# Altium PCB LED kocka.PcbDoc
Units mil, origin at the board's own origin, x right, y up, seen from the top; angles counter-clockwise.
Board outline 5314.96 x 5314.96 mil, 2 copper layers (Top Layer, Bottom Layer); 247 components, 179 nets, 679 pads, 2 vias.
Unrouted connection lines stored in the file: 34.
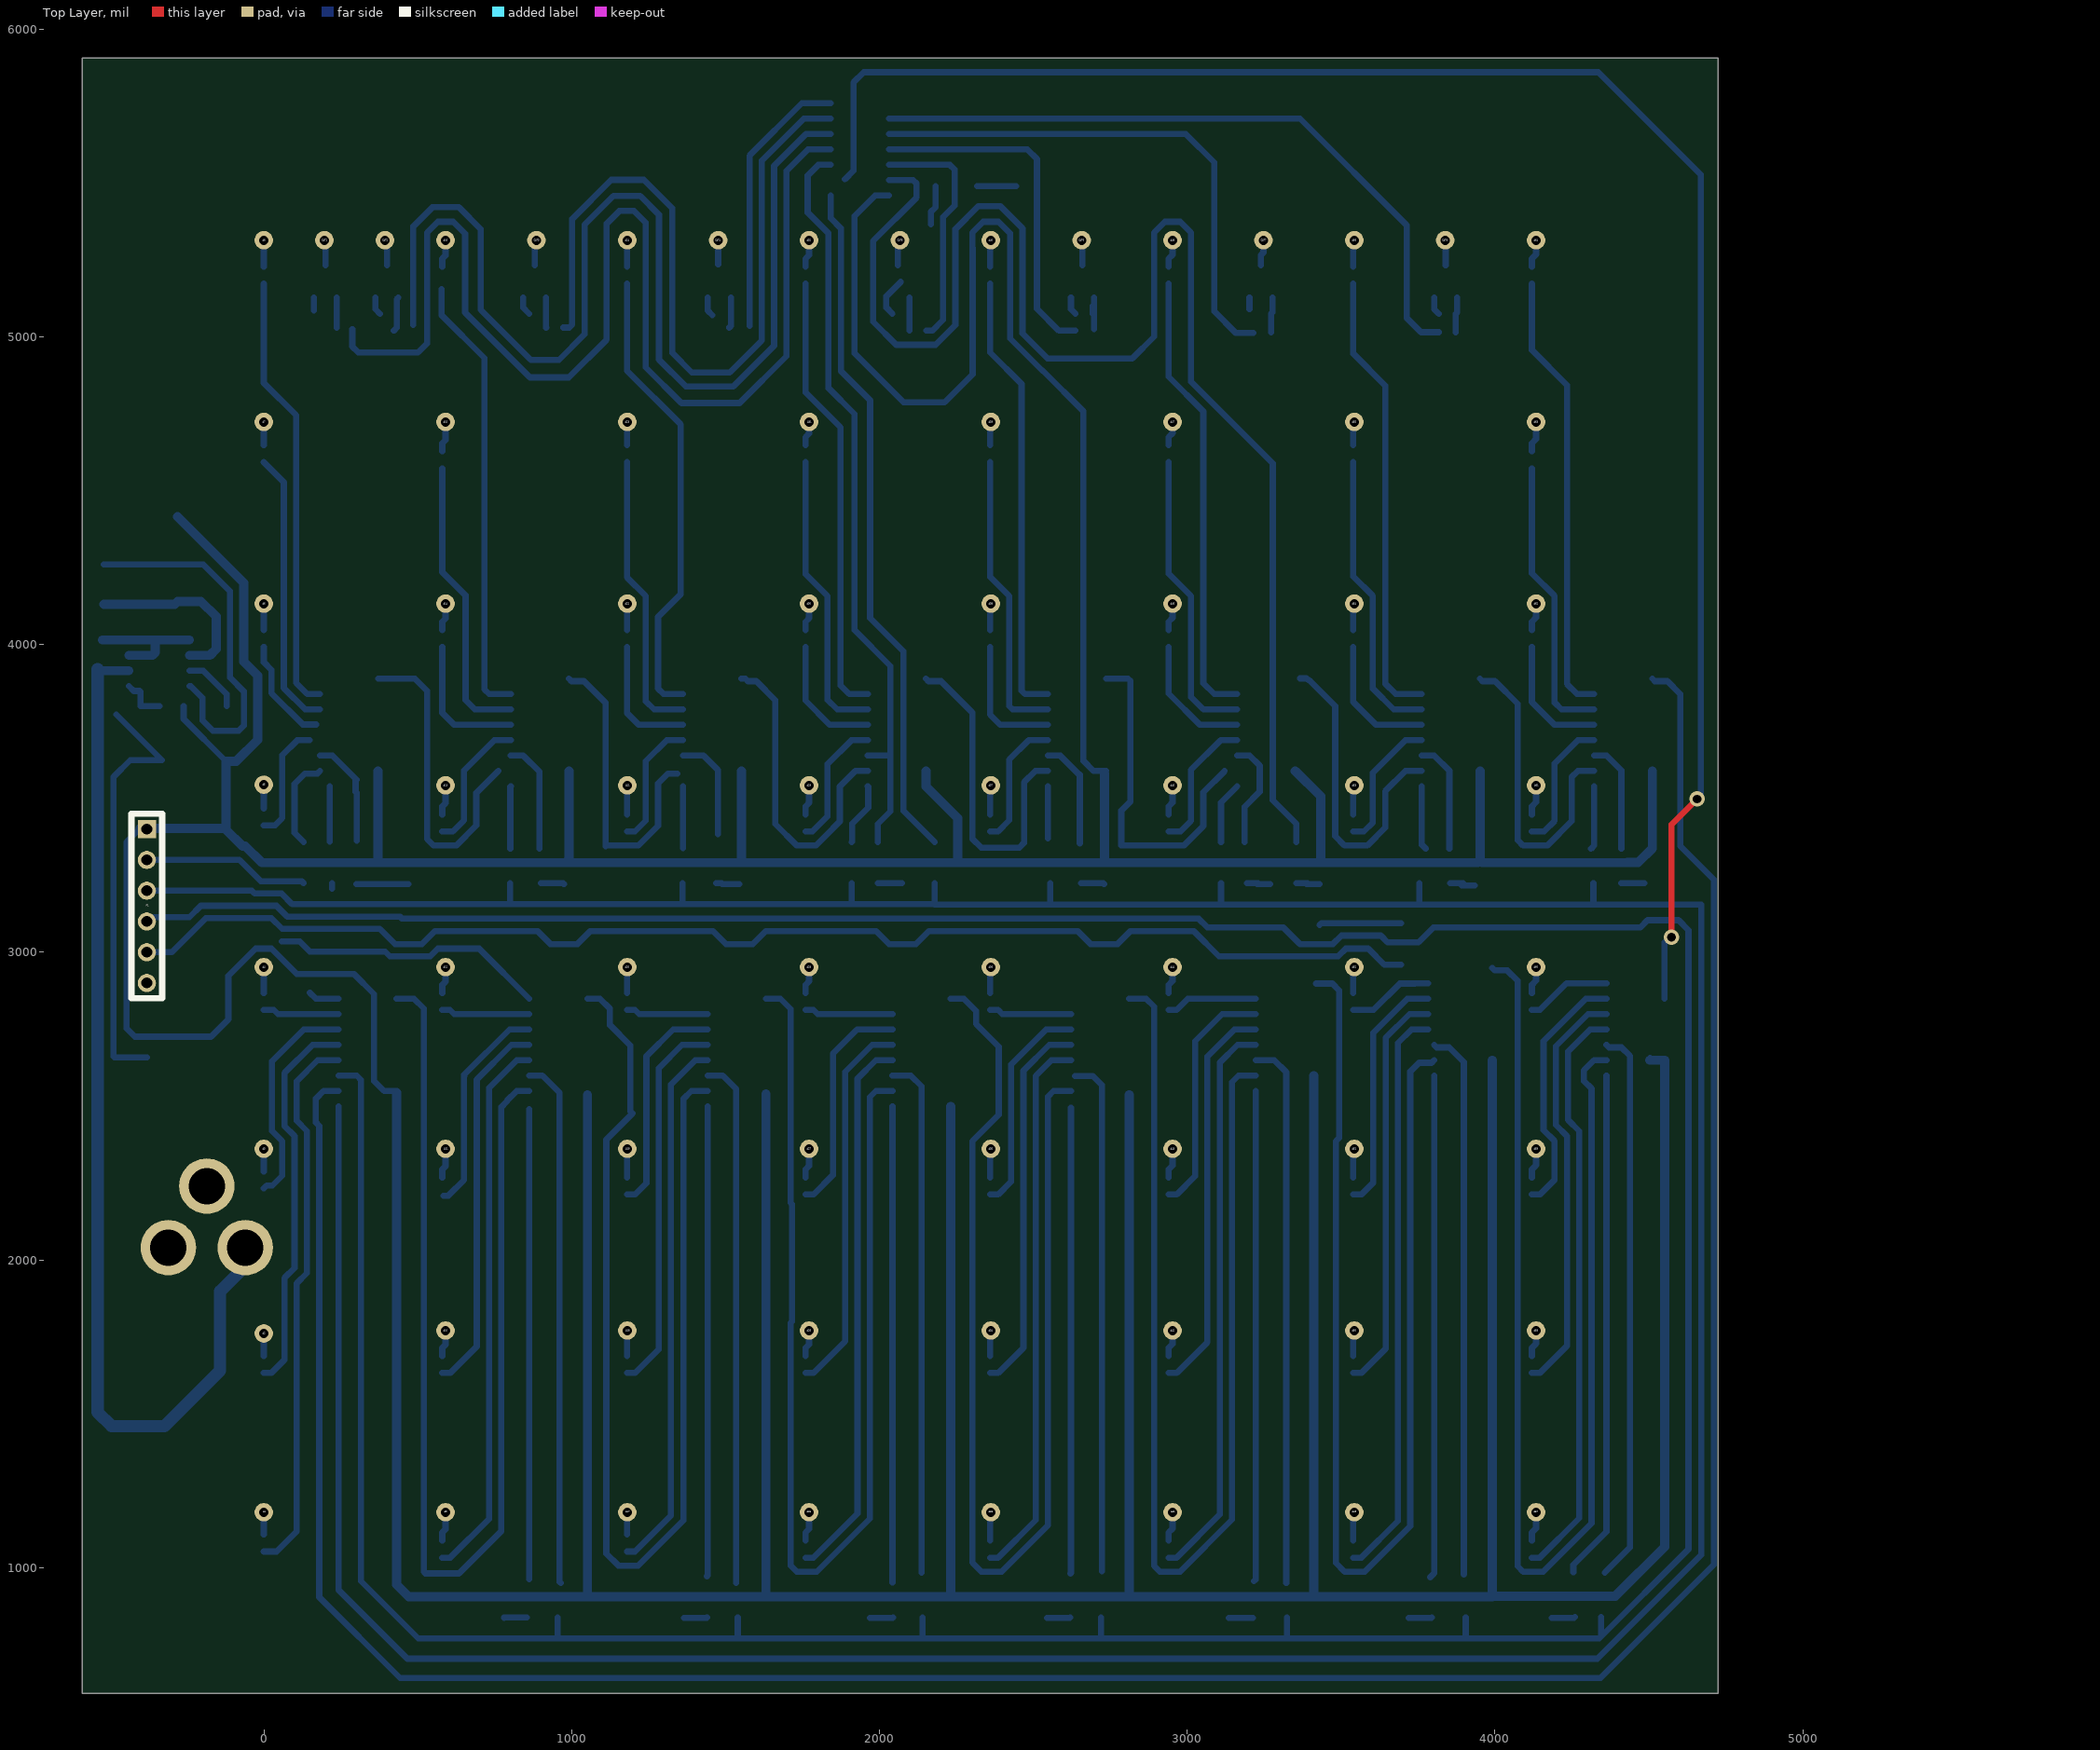
[diagram p0: Top Layer view]
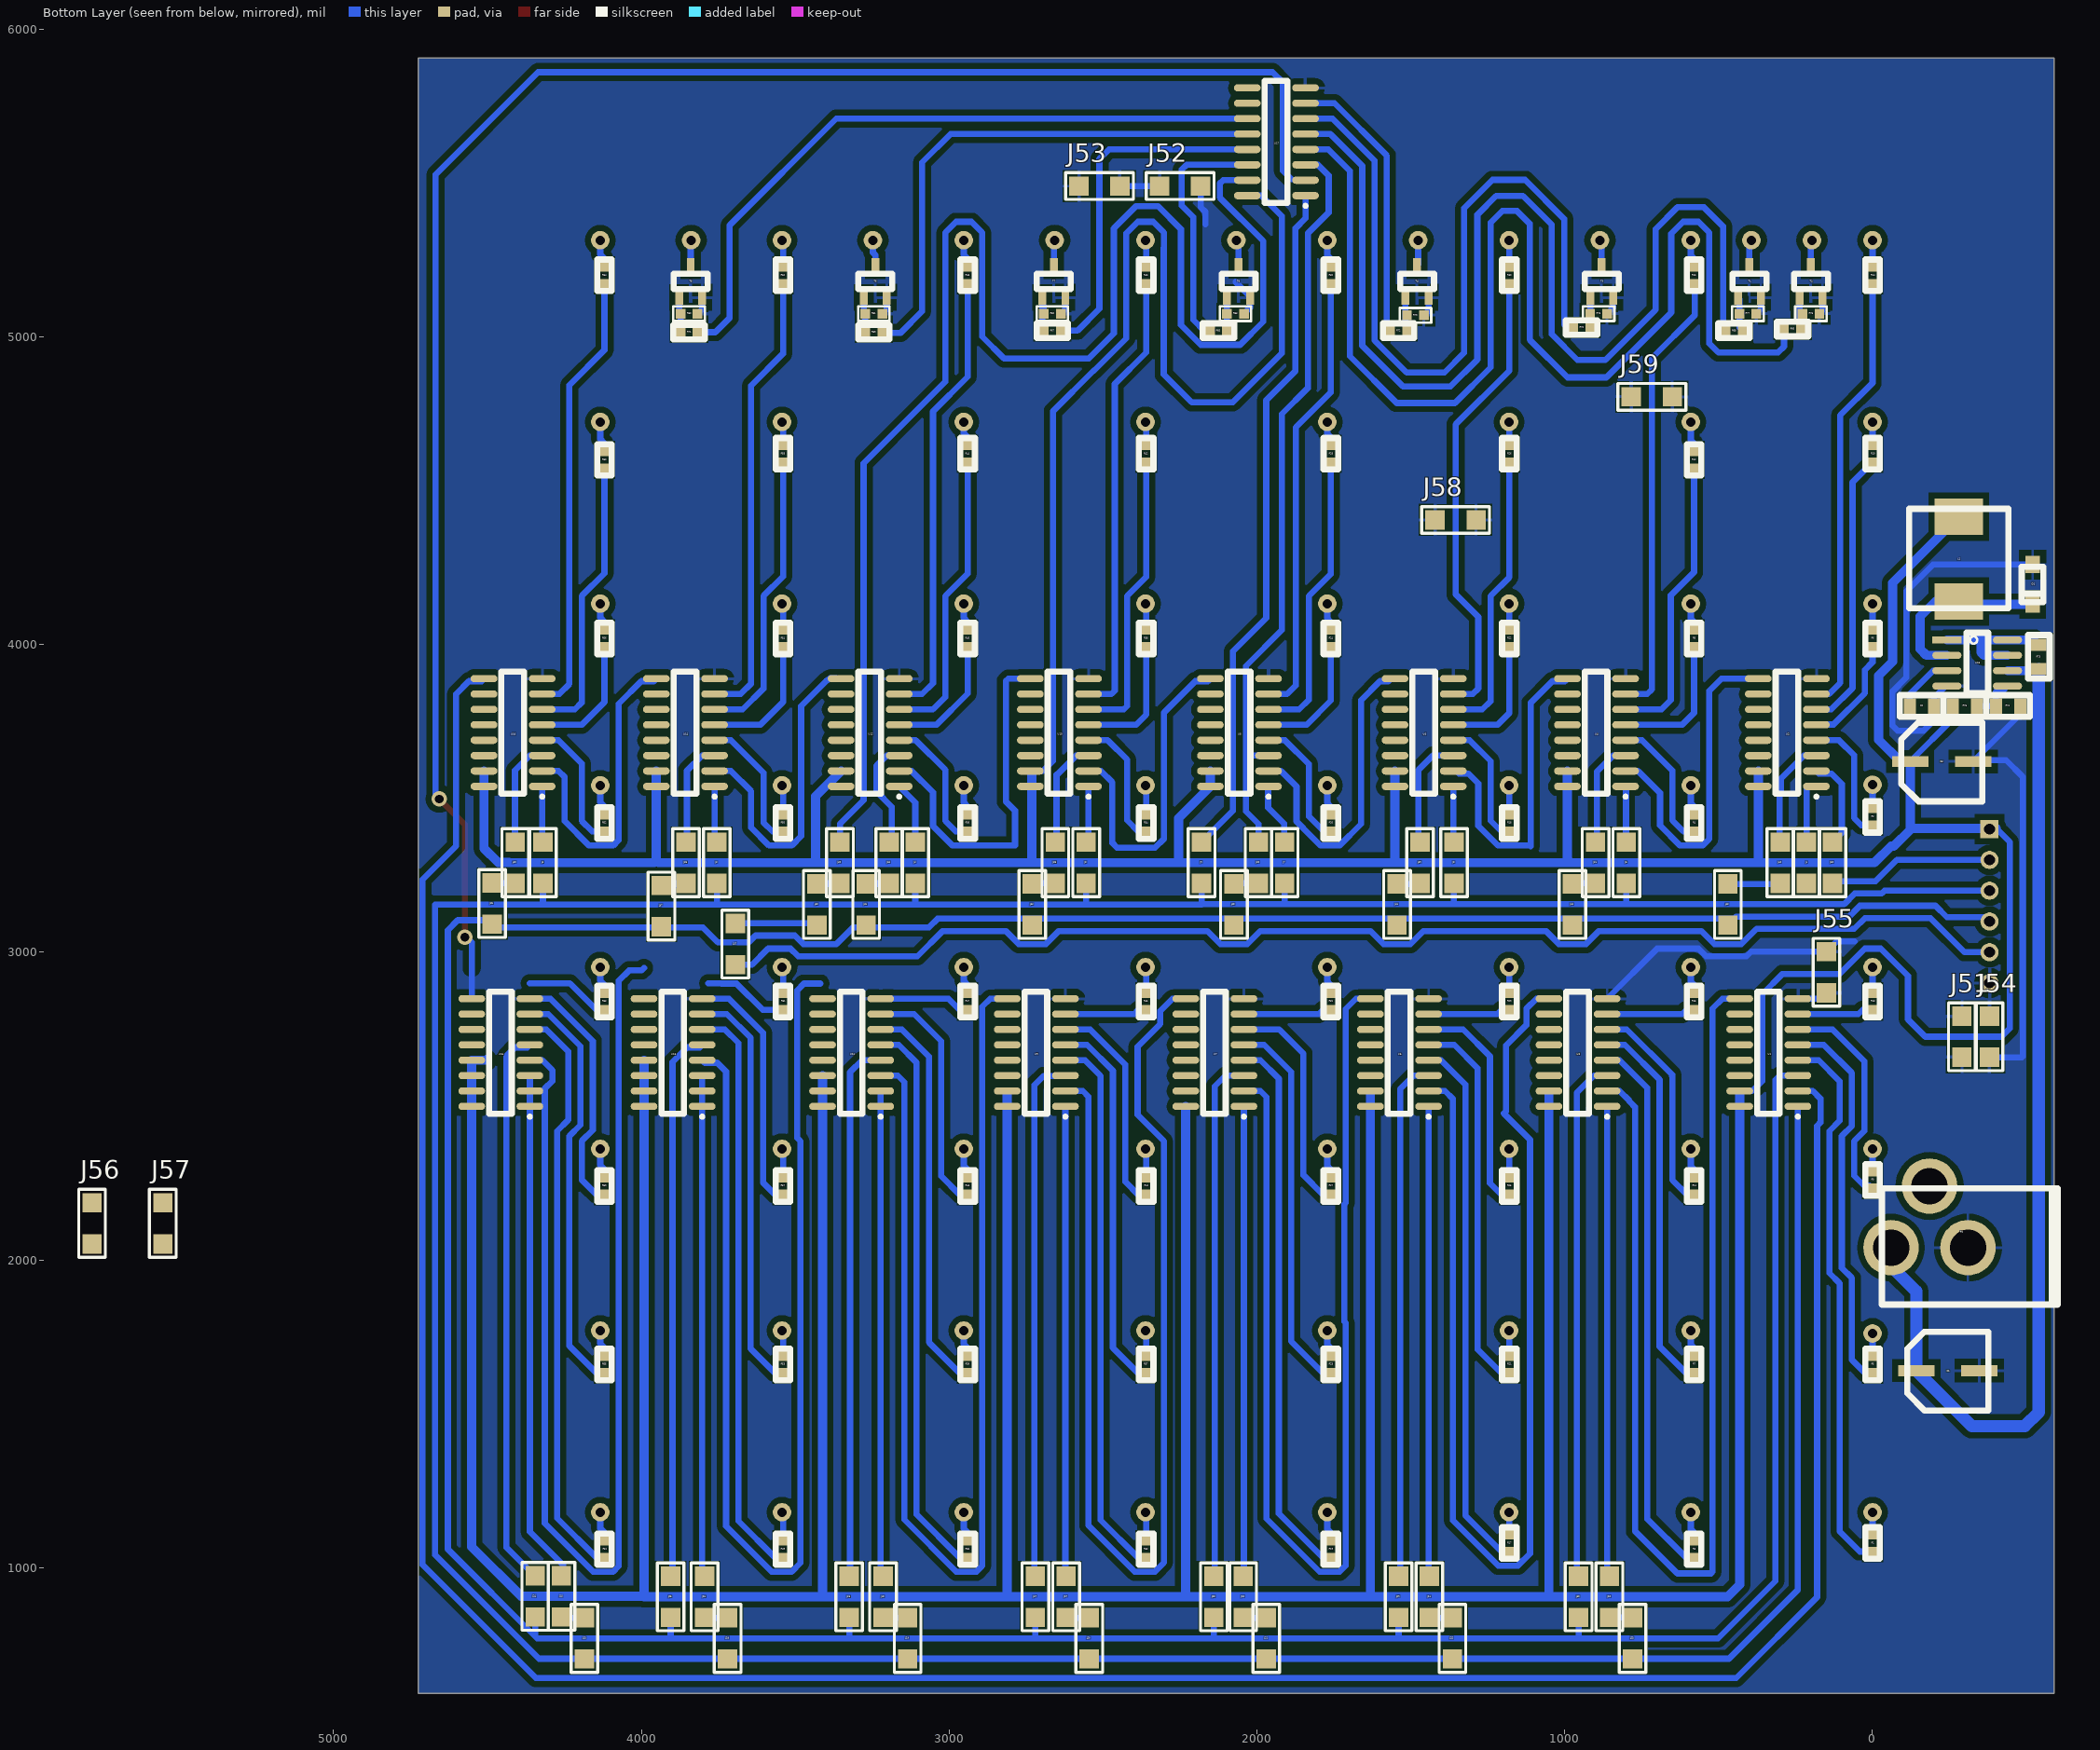
[diagram p1: Bottom Layer view, seen from below]
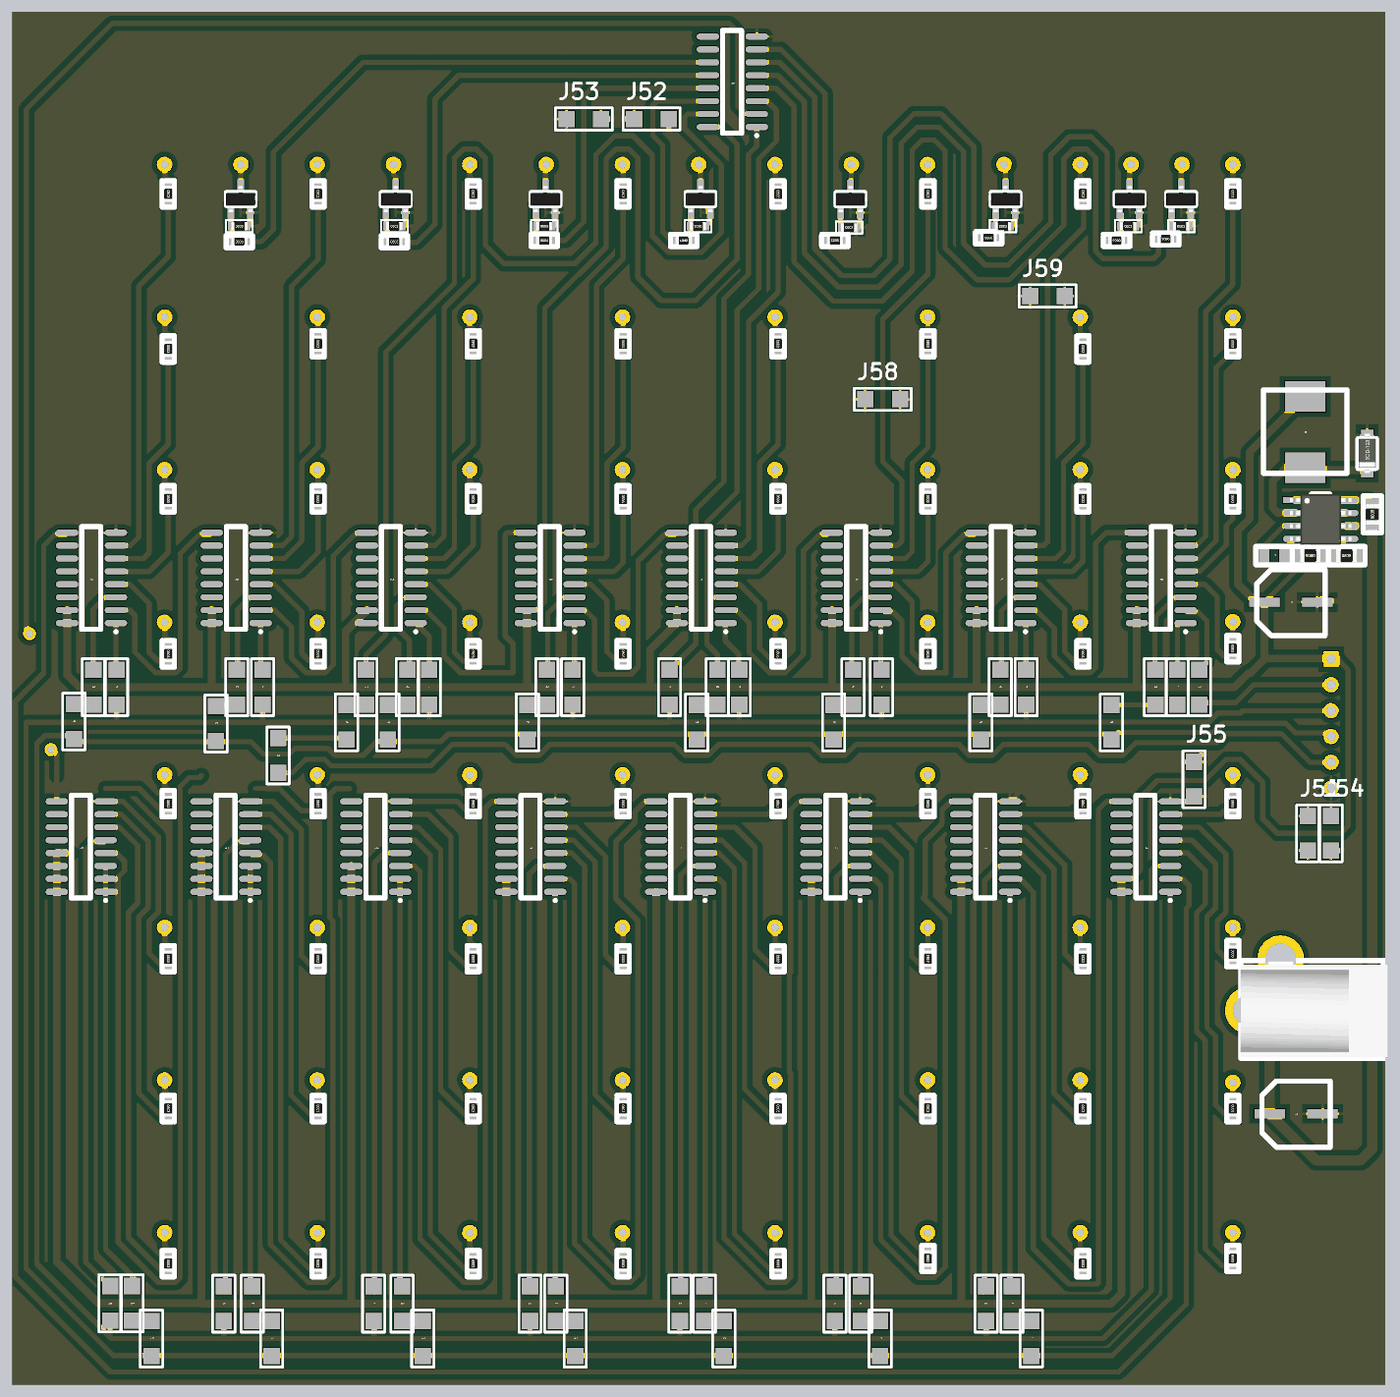
[diagram p2: 3D render of the assembled board from below, using the file's embedded part models]

## Layer stack, top to bottom
Top Layer: signal copper 1.4
Dielectric: dielectric 12.6, FR-4, Dk 4.8
Bottom Layer: signal copper 1.4

## Board outline
-590.55,590.55 4724.41,590.55 4724.41,5905.51 -590.55,5905.51

## Design rules (kind name [scope] priority, off if disabled: settings)
Clearance [All] p1: gap=20
PolygonConnect [All] p1: connectstyle=Relief reliefconductorwidth=10 reliefentries=4 polygonreliefangle="90 Angle"
RoutingVias [All] p1: holewidth=28 width=50 viastyle="Through Hole" minholewidth=28 minwidth=50 maxholewidth=28 maxwidth=50
SilkToSilkClearance [All] p1: silktosilkclearance=5
SilkscreenOverComponentPads [All] p1 off: minsilkscreentomaskgap=6
SolderMaskExpansion [All] p1: expansion=4
Width [All] p1: maxlimit=40 minlimit=20 preferedwidth=30
26 further rules are at their usual default settings.

## Components (designator, comment, footprint, x,y, rotation, side; value= is the part's Value field where it differs from the comment)
A1 "" via_300x400#1 0,1180 r0 top
A2 "" via_300x400#2 0,1770.55 r0 top
A3 "" via_300x400#1 0,2361.1 r0 top
A4 "" via_300x400#1 0,2951.65 r0 top
A5 "" via_300x400#3 0,3542.2 r0 top
A6 "" via_300x400#1 0,4132.76 r0 top
A7 "" via_300x400#1 0,4723.31 r0 top
A8 "" via_300x400#1 0,5313.86 r0 top
A9 "" via_300x400#1 590.55,1180 r90 top
A10 "" via_300x400#1 590.55,1770.55 r180 top
A11 "" via_300x400#1 590.55,2361.1 r90 top
A12 "" via_300x400#1 590.55,2951.65 r180 top
A13 "" via_300x400#1 590.55,3542.2 r180 top
A14 "" via_300x400#1 590.55,4132.76 r180 top
A15 "" via_300x400#1 590.55,4723.31 r180 top
A16 "" via_300x400#1 590.55,5313.86 r180 top
A17 "" via_300x400#1 1181.1,1180 r180 top
A18 "" via_300x400#1 1181.1,1770.55 r180 top
A19 "" via_300x400#1 1181.1,2361.1 r180 top
A20 "" via_300x400#1 1181.1,2951.65 r180 top
A21 "" via_300x400#1 1181.1,3542.2 r90 top
A22 "" via_300x400#1 1181.1,4132.76 r180 top
A23 "" via_300x400#1 1181.1,4723.31 r180 top
A24 "" via_300x400#1 1181.1,5313.86 r180 top
A25 "" via_300x400#1 1771.65,1180 r180 top
A26 "" via_300x400#1 1771.65,1770.55 r180 top
A27 "" via_300x400#1 1771.65,2361.1 r180 top
A28 "" via_300x400#1 1771.65,2951.65 r180 top
A29 "" via_300x400#1 1771.65,3542.2 r180 top
A30 "" via_300x400#1 1771.65,4132.76 r180 top
A31 "" via_300x400#1 1771.65,4723.31 r90 top
A32 "" via_300x400#1 1771.65,5313.86 r180 top
A33 "" via_300x400#1 2362.2,1180 r180 top
A34 "" via_300x400#1 2362.2,1770.55 r180 top
A35 "" via_300x400#1 2362.2,2361.1 r180 top
A36 "" via_300x400#1 2362.2,2951.65 r180 top
A37 "" via_300x400#1 2362.2,3542.2 r180 top
A38 "" via_300x400#1 2362.2,4132.76 r180 top
A39 "" via_300x400#1 2362.2,4723.31 r180 top
A40 "" via_300x400#1 2362.2,5313.86 r180 top
A41 "" via_300x400#1 2952.76,1180 r90 top
A42 "" via_300x400#1 2952.76,1770.55 r180 top
A43 "" via_300x400#1 2952.76,2361.1 r180 top
A44 "" via_300x400#1 2952.76,2951.65 r180 top
A45 "" via_300x400#1 2952.76,3542.2 r180 top
A46 "" via_300x400#1 2952.76,4132.76 r180 top
A47 "" via_300x400#1 2952.76,4723.31 r180 top
A48 "" via_300x400#1 2952.76,5313.86 r180 top
A49 "" via_300x400#1 3543.31,1180 r180 top
A50 "" via_300x400#1 3543.31,1770.55 r180 top
A51 "" via_300x400#1 3543.31,2361.1 r90 top
A52 "" via_300x400#1 3543.31,2951.65 r180 top
A53 "" via_300x400#1 3543.31,3542.2 r180 top
A54 "" via_300x400#1 3543.31,4132.76 r180 top
A55 "" via_300x400#1 3543.31,4723.31 r180 top
A56 "" via_300x400#1 3543.31,5313.86 r180 top
A57 "" via_300x400#1 4133.86,1180 r180 top
A58 "" via_300x400#1 4133.86,1770.55 r180 top
A59 "" via_300x400#1 4133.86,2361.1 r180 top
A60 "" via_300x400#1 4133.86,2951.65 r180 top
A61 "" via_300x400#1 4133.86,3542.2 r90 top
A62 "" via_300x400#1 4133.86,4132.76 r180 top
A63 "" via_300x400#1 4133.86,4723.31 r180 top
A64 "" via_300x400#1 4133.86,5313.86 r180 top
C1 "100uF" FP_CAP_ELKO_6,3X6,3 -160,1640 r180 bottom
C2 "470pF" FP_0805_CAP_085 -160,3800 r0 bottom
C3 "100uF" FP_CAP_ELKO_6,3X6,3 -140,3620 r180 bottom
CAT1 "" via_300x400#4 180,5313.86 r180 top
CAT2 "" via_300x400#5 380,5313.86 r180 top
CAT3 "" via_300x400#6 880,5313.86 r180 top
CAT4 "" via_300x400#7 1440,5313.86 r180 top
CAT5 "" via_300x400#8 2060,5313.86 r180 top
CAT6 "" via_300x400#9 2640,5313.86 r180 top
CAT7 "" via_300x400#10 3220,5313.86 r180 top
CAT8 "" via_300x400#11 3820,5313.86 r180 top
D1 "1N5819" FP_SOD-123 -520,4260 r270 bottom
J1 "0R" FP_1206_RES_SIMPLE 215,3291 r270 bottom
J2 "0R" FP_1206_RES_SIMPLE 3755,3291 r270 bottom
J3 "0R" FP_1206_RES_SIMPLE 4320,3291 r270 bottom
J4 "0R" FP_1206_RES_SIMPLE 3110,3291 r270 bottom
J5 "0R" FP_1206_RES_SIMPLE 800,3291 r270 bottom
J6 "0R" FP_1206_RES_SIMPLE 1360,3291 r270 bottom
J7 "0R" FP_1206_RES_SIMPLE 1910,3291 r270 bottom
J8 "0R" FP_1206_RES_SIMPLE 2555,3291 r270 bottom
J9 "0R" FP_1206_RES_SIMPLE 2180,3291 r270 bottom
J10 "0R" FP_1206_RES_SIMPLE 855,905 r270 bottom
J11 "0R" FP_1206_RES_SIMPLE 1440,905 r270 bottom
J12 "0R" FP_1206_RES_SIMPLE 2045,905 r270 bottom
J13 "0R" FP_1206_RES_SIMPLE 4185,770 r270 bottom
J14 "0R" FP_1206_RES_SIMPLE 4260,906.49 r270 bottom
J15 "0R" FP_1206_RES_SIMPLE 3795,905 r270 bottom
J16 "0R" FP_1206_RES_SIMPLE 3215,905 r270 bottom
J17 "0R" FP_1206_RES_SIMPLE 2620,905 r270 bottom
J18 "0R" FP_1206_RES_SIMPLE 3720,770 r90 bottom
J19 "0R" FP_1206_RES_SIMPLE 3135,770 r90 bottom
J20 "0R" FP_1206_RES_SIMPLE 2545,770 r90 bottom
J21 "0R" FP_1206_RES_SIMPLE 1970,770 r90 bottom
J22 "0R" FP_1206_RES_SIMPLE 1365,770 r90 bottom
J23 "0R" FP_1206_RES_SIMPLE 780,770 r90 bottom
J24 "0R" FP_1206_RES_SIMPLE 4345,906.49 r90 bottom
J25 "0R" FP_1206_RES_SIMPLE 3905,905 r90 bottom
J26 "0R" FP_1206_RES_SIMPLE 3325,905 r90 bottom
J27 "0R" FP_1206_RES_SIMPLE 2720,905 r90 bottom
J28 "0R" FP_1206_RES_SIMPLE 2140,905 r90 bottom
J29 "0R" FP_1206_RES_SIMPLE 1540,905 r90 bottom
J30 "0R" FP_1206_RES_SIMPLE 955,905 r90 bottom
J31 "0R" FP_1206_RES_SIMPLE 900,3291 r90 bottom
J32 "0R" FP_1206_RES_SIMPLE 1995,3291 r90 bottom
J33 "0R" FP_1206_RES_SIMPLE 2730,3155 r90 bottom
J34 "0R" FP_1206_RES_SIMPLE 3195,3291 r90 bottom
J35 "0R" FP_1206_RES_SIMPLE 4485,3158 r270 bottom
J36 "0R" FP_1206_RES_SIMPLE 3855,3291 r90 bottom
J37 "0R" FP_1206_RES_SIMPLE 3935,3150 r90 bottom
J38 "0R" FP_1206_RES_SIMPLE 2655,3291 r90 bottom
J39 "0R" FP_1206_RES_SIMPLE 1470,3291 r90 bottom
J40 "0R" FP_1206_RES_SIMPLE 4410,3291 r90 bottom
J41 "0R" FP_1206_RES_SIMPLE 1545,3155 r90 bottom
J42 "0R" FP_1206_RES_SIMPLE 300,3291 r90 bottom
J43 "0R" FP_1206_RES_SIMPLE 470,3155 r90 bottom
J44 "0R" FP_1206_RES_SIMPLE 975,3155 r90 bottom
J45 "0R" FP_1206_RES_SIMPLE 3270,3155 r90 bottom
J46 "0R" FP_1206_RES_SIMPLE 2075,3155 r90 bottom
J47 "0R" FP_1206_RES_SIMPLE 3695,3026.57 r90 bottom
J48 "0R" FP_1206_RES_SIMPLE 3430,3155 r90 bottom
J49 "0R" FP_1206_RES_SIMPLE 3355,3291 r90 bottom
J50 "0R" FP_1206_RES_SIMPLE 130,3291 r90 bottom
J51 "0R" FP_1206_RES_SIMPLE -290,2725.43 r90 bottom
J52 "0R" FP_1206_RES_SIMPLE 2250,5490 r180 bottom
J53 "0R" FP_1206_RES_SIMPLE 2512,5490 r180 bottom
J54 "0R" FP_1206_RES_SIMPLE -380,2725.43 r90 bottom
J55 "0R" FP_1206_RES_SIMPLE 150,2935 r90 bottom
J56 "0R" FP_1206_RES_SIMPLE 5785,2119 r90 bottom
J57 "0R" FP_1206_RES_SIMPLE 5555,2119 r90 bottom
J58 "0R" FP_1206_RES_SIMPLE 1355,4405 r180 bottom
J59 "0R" FP_1206_RES_SIMPLE 717,4805 r180 bottom
L1 "220uH" FP_IND_MURATA3131 -280,4140 r180 bottom
P1 "Header 6" HDR1X6 -380,3400 r270 top
P2 "Header 2" FP_DC_TAP_ANYA -60,2040 r270 bottom
R1 "1K" FP_0603_RES 0,1080 r270 bottom
R2 "1K" FP_0603_RES 0,3440 r270 bottom
R3 "1K" FP_0603_RES 580,1060 r270 bottom
R4 "1K" FP_0603_RES 580,3420 r270 bottom
R5 "1K" FP_0603_RES 0,1660 r270 bottom
R6 "1K" FP_0603_RES 0,4020 r270 bottom
R7 "1K" FP_0603_RES 580,1660 r270 bottom
R8 "1K" FP_0603_RES 580,4020 r270 bottom
R9 "1K" FP_0603_RES 0,2260 r270 bottom
R10 "1K" FP_0603_RES 0,4620 r270 bottom
R11 "1K" FP_0603_RES 580,2240 r270 bottom
R12 "1K" FP_0603_RES 580,4600 r270 bottom
R13 "1K" FP_0603_RES 0,2840 r270 bottom
R14 "1K" FP_0603_RES 0,5200 r270 bottom
R15 "1K" FP_0603_RES 580,2840 r270 bottom
R16 "1K" FP_0603_RES 580,5200 r270 bottom
R17 "1K" FP_0603_RES 1180,1080 r270 bottom
R18 "1K" FP_0603_RES 1180,3420 r270 bottom
R19 "1K" FP_0603_RES 1760,1060 r270 bottom
R20 "1K" FP_0603_RES 1760,3420 r270 bottom
R21 "1K" FP_0603_RES 1180,1660 r270 bottom
R22 "1K" FP_0603_RES 1180,4020 r270 bottom
R23 "1K" FP_0603_RES 1760,1660 r270 bottom
R24 "1K" FP_0603_RES 1760,4020 r270 bottom
R25 "1K" FP_0603_RES 1180,2240 r270 bottom
R26 "1K" FP_0603_RES 1180,4620 r270 bottom
R27 "1K" FP_0603_RES 1760,2240 r270 bottom
R28 "1K" FP_0603_RES 1760,4620 r270 bottom
R29 "1K" FP_0603_RES 1180,2840 r270 bottom
R30 "1K" FP_0603_RES 1180,5200 r270 bottom
R31 "1K" FP_0603_RES 1760,2840 r270 bottom
R32 "1K" FP_0603_RES 1760,5200 r270 bottom
R33 "1K" FP_0603_RES 2360,1060 r270 bottom
R34 "1K" FP_0603_RES 2360,3420 r270 bottom
R35 "1K" FP_0603_RES 2940,1060 r270 bottom
R36 "1K" FP_0603_RES 2940,3420 r270 bottom
R37 "1K" FP_0603_RES 2360,1660 r270 bottom
R38 "1K" FP_0603_RES 2360,4020 r270 bottom
R39 "1K" FP_0603_RES 2940,1660 r270 bottom
R40 "1K" FP_0603_RES 2940,4020 r270 bottom
R41 "1K" FP_0603_RES 2360,2240 r270 bottom
R42 "1K" FP_0603_RES 2360,4620 r270 bottom
R43 "1K" FP_0603_RES 2940,2240 r270 bottom
R44 "1K" FP_0603_RES 2940,4620 r270 bottom
R45 "1K" FP_0603_RES 2360,2840 r270 bottom
R46 "1K" FP_0603_RES 2360,5200 r270 bottom
R47 "1K" FP_0603_RES 2940,2840 r270 bottom
R48 "1K" FP_0603_RES 2940,5200 r270 bottom
R49 "1K" FP_0603_RES 3540,1060 r270 bottom
R50 "1K" FP_0603_RES 3540,3420 r270 bottom
R51 "1K" FP_0603_RES 4120,1060 r270 bottom
R52 "1K" FP_0603_RES 4120,3420 r270 bottom
R53 "1K" FP_0603_RES 3540,1660 r270 bottom
R54 "1K" FP_0603_RES 3540,4020 r270 bottom
R55 "1K" FP_0603_RES 4120,1660 r270 bottom
R56 "1K" FP_0603_RES 4120,4020 r270 bottom
R57 "1K" FP_0603_RES 3540,2240 r270 bottom
R58 "1K" FP_0603_RES 3540,4620 r270 bottom
R59 "1K" FP_0603_RES 4120,2240 r270 bottom
R60 "1K" FP_0603_RES 4120,4600 r270 bottom
R61 "1K" FP_0603_RES 3540,2840 r270 bottom
R62 "1K" FP_0603_RES 3540,5200 r270 bottom
R63 "1K" FP_0603_RES 4120,2840 r270 bottom
R64 "1K" FP_0603_RES 4120,5200 r270 bottom
R65 "1K" FP_0603_RES 2125,5020 r0 bottom
R66 "1K" FP_0603_RES 260,5025 r0 bottom
R67 "1K" FP_0603_RES 2665,5020 r180 bottom
R68 "1K" FP_0603_RES 450,5020 r0 bottom
R69 "1K" FP_0603_RES 3245,5015 r180 bottom
R70 "1K" FP_0603_RES 945,5030 r0 bottom
R71 "1K" FP_0603_RES 3845,5015 r180 bottom
R72 "1K" FP_0603_RES 1540,5020 r0 bottom
R73 "0.33R" FP_0805_RES -540,3960 r90 bottom
R74 "1K" FP_0805_RES -440,3800 r180 bottom
R75 "3K" FP_0805_RES -300,3800 r0 bottom
R76 "47K" FP_0603_RES 200,5075 r180 bottom
R77 "47K" FP_0603_RES 405,5075 r180 bottom
R78 "47K" FP_0603_RES 890,5075 r180 bottom
R79 "47K" FP_0603_RES 1485,5070 r180 bottom
R80 "47K" FP_0603_RES 3845,5075 r180 bottom
R81 "47K" FP_0603_RES 3245,5075 r180 bottom
R82 "47K" FP_0603_RES 2665,5075 r180 bottom
R83 "47K" FP_0603_RES 2070,5075 r0 bottom
T1 "NMOS" BBMF170 400,5180 r270 bottom
T2 "NMOS" BBMF170 200,5180 r270 bottom
T3 "NMOS" BBMF170 880,5180 r270 bottom
T4 "NMOS" BBMF170 1480,5180 r270 bottom
T5 "NMOS" BBMF170 3840,5180 r270 bottom
T6 "NMOS" BBMF170 3240,5180 r270 bottom
T7 "NMOS" BBMF170 2660,5180 r270 bottom
T8 "NMOS" BBMF170 2060,5180 r270 bottom
U1 "74HC4094" SOIC16 340,2700 r270 bottom
U2 "74HC4094" SOIC16 280,3740 r270 bottom
U3 "74HC4094" SOIC16 960,2700 r270 bottom
U4 "74HC4094" SOIC16 900,3740 r270 bottom
U5 "74HC4094" SOIC16 1540,2700 r270 bottom
U6 "74HC4094" SOIC16 1460,3740 r270 bottom
U7 "74HC4094" SOIC16 2140,2700 r270 bottom
U8 "74HC4094" SOIC16 2060,3740 r270 bottom
U9 "74HC4094" SOIC16 2720,2700 r270 bottom
U10 "74HC4094" SOIC16 2645,3740 r270 bottom
U11 "74HC4094" SOIC16 3320,2700 r270 bottom
U12 "74HC4094" SOIC16 3260,3740 r270 bottom
U13 "74HC4094" SOIC16 3900,2700 r270 bottom
U14 "74HC4094" SOIC16 3860,3740 r270 bottom
U15 "74HC4094" SOIC16 4460,2700 r270 bottom
U16 "74HC4094" SOIC16 4420,3740 r270 bottom
U17 "74HC4094" SOIC16 1940,5660 r270 bottom
U18 "MC34063A" FP_SO8_MS012AA -340,3940 r180 bottom

## Footprints (in the part's own frame and the unit in brackets; to place one, negate y for a bottom-side part, rotate by r counter-clockwise, add the part's x,y. Pads: shape width x height; smd on the part's side, far side on the other; paste and mask are expansions set on the pad)
BBMF170 [mm] "SOT23-3 tok"
  rect 1.2x0.65 smd: D(-1.327,0) G(1.327,-0.95) S(1.327,0.95)
  silkscreen extent -0.64,-1.4 0.64,1.4, body extent -1.27,-1.46 1.27,1.46, height 0.97
FP_0603_RES [mm] "0603 ellenállás"
  rect 0.8x0.8 smd: 1(-0.7,0) 2(0.7,0)
  silkscreen extent -1.3,-0.6 1.3,0.6, body extent -0.8,-0.4 0.8,0.4, height 0.44
FP_0805_CAP_085 [mm] "0805 kapacitás YAGEO 0.85mm magas"
  rect 1x1.3 smd: 1(-1,0) 2(1,0)
  silkscreen extent -1.8,-0.9 1.8,0.9, body extent -1,-0.64 1.03,0.64, height 0.85
FP_0805_RES [mm] "0805 ellenállás"
  rect 1x1.3 smd: 1(-1,0) 2(1,0)
  silkscreen extent -1.8,-0.9 1.8,0.9, body extent -1,-0.62 1,0.63, height 0.62
FP_1206_RES_SIMPLE [mm] "1206 ellenállás, amit én csináltam"
  rect 1.6x1.6 smd: 1(-1.7,0) 2(1.7,0)
  silkscreen extent -2.8,-1.1 2.8,1.1, body extent -1.52,-0.79 1.58,0.79, height 0.5
FP_CAP_ELKO_6,3X6,3 [mm] "680 uF/SMD-NIC 47 uF/SMD-NIC ELKO 16 V 105°C 20 % KIS IMPEDANCIÁS SMD O6,3x6,3mm"
  rect 3x0.9 smd: N(4.75,0) P(-0.45,0)
  silkscreen extent -1.2,-3.3 5.5,3.2, body extent -1.25,-3.3 5.35,3.3, height 6.3
FP_DC_TAP_ANYA [mil] "DC HEBA25 TÁPFESZÜLTSÉG ALJZAT ZÁRT, NYÁKBA 90°"
  round 180 hole 118: 1(0,0) 2(0,250) 3(-200,125)
  silkscreen extent -193,-30 185,541, body extent -190,-31 183,539, height 440
FP_IND_MURATA3131 [mm] "Murata Chip Inductor LQH88P Series (3131 Size)"
  rect 4x3 smd: 1(0,0) 2(0,7)
  silkscreen extent -4.1,-0.55 4.1,7.65, body extent -4,-0.55 4,7.65, height 3.8
FP_SO8_MS012AA [mm] "SO8 JEDEC MS-012AA, Analog Devices R-8, SO8-SOT96-1, NS M08A"
  rect 2.4x0.6 smd: 1(-2.5,1.905)
  oval 2.4x0.6 smd: 2(-2.5,0.635) 3(-2.5,-0.635) 4(-2.5,-1.905) 5(2.5,-1.905) 6(2.5,-0.635) 7(2.5,0.635) 8(2.5,1.905)
  silkscreen extent -0.9,-2.5 0.9,2.5, body extent -3.03,-2.5 3.03,2.5, height 1.9
FP_SOD-123 [mm]
  rect 1.41x1.22 smd: 1(3.27,0) 2(0,0)
  silkscreen extent 0.2,-0.9 3.1,0.9, body extent -0.3,-0.85 3.55,0.85, height 1.47
HDR1X6 [mm] "Connector; Header; 6 Position"
  rect 1.5x1.5 hole 0.9: 1(0,0)
  round 1.5 hole 0.9: 2(2.54,0) 3(5.08,0) 4(7.62,0) 5(10.16,0) 6(12.7,0)
  silkscreen extent -1.27,-1.27 13.97,1.27
SOIC16 [mm]
  oval 0.6x2.2 smd: 1(5.105,2.476) 2(3.835,2.476) 3(2.565,2.476) 4(1.295,2.476) 5(0.025,2.476) 6(-1.245,2.476) 7(-2.515,2.476) 8(-3.785,2.476) 9(-3.785,-2.324) 10(-2.515,-2.324) 11(-1.245,-2.324) 12(0.025,-2.324) 13(1.295,-2.324) 14(2.565,-2.324) 15(3.835,-2.324) 16(5.105,-2.324)
  silkscreen extent -4.37,-0.89 6.08,2.6
via_300x400#1 [mil]
  round 60 hole 30: 1(0,0)
via_300x400#2 [mil]
  round 60 hole 30: 1(0,-9.45)
via_300x400#3 [mil]
  round 60 hole 30: 1(0,2.2)
via_300x400#4 [mil]
  round 60 hole 30: 1(-16.85,0)
via_300x400#5 [mil]
  round 60 hole 30: 1(-13.7,0)
via_300x400#6 [mil]
  round 60 hole 30: 1(-5.83,0)
via_300x400#7 [mil]
  round 60 hole 30: 1(-36.38,0)
via_300x400#8 [mil]
  round 60 hole 30: 1(-6.93,0)
via_300x400#9 [mil]
  round 60 hole 30: 1(-17.48,0)
via_300x400#10 [mil]
  round 60 hole 30: 1(-28.03,0)
via_300x400#11 [mil]
  round 60 hole 30: 1(-18.58,0)

## Part data
A1 A2 A3 A4 A5 A6 A7 A8 A9 A10 A11 A12 A13 A14 A15 A16 A17 A18 A19 A20 A21 A22 A23 A24 A25 A26 A27 A28 A29 A30 A31 A32 A33 A34 A35 A36 A37 A38 A39 A40 A41 A42 A43 A44 A45 A46 A47 A48 A49 A50 A51 A52 A53 A54 A55 A56 A57 A58 A59 A60 A61 A62 A63 A64 CAT1 CAT2 CAT3 CAT4 CAT5 CAT6 CAT7 CAT8: library part TestPoint
C1 C3: library part CAP_ELECT, "Polarized Capacitor"
C2: library part CAP, "Capacitor"
D1: library part DIODE
J1 J2 J3 J4 J5 J6 J7 J8 J9 J10 J11 J12 J13 J14 J15 J16 J17 J18 J19 J20 J21 J22 J23 J24 J25 J26 J27 J28 J29 J30 J31 J32 J33 J34 J35 J36 J37 J38 J39 J40 J41 J42 J43 J44 J45 J46 J47 J48 J49 J50 J51 J52 J53 J54 J55 J56 J57 J58 J59 R1 R2 R3 R4 R5 R6 R7 R8 R9 R10 R11 R12 R13 R14 R15 R16 R17 R18 R19 R20 R21 R22 R23 R24 R25 R26 R27 R28 R29 R30 R31 R32 R33 R34 R35 R36 R37 R38 R39 R40 R41 R42 R43 R44 R45 R46 R47 R48 R49 R50 R51 R52 R53 R54 R55 R56 R57 R58 R59 R60 R61 R62 R63 R64 R65 R66 R67 R68 R69 R70 R71 R72 R73 R74 R75 R76 R77 R78 R79 R80 R81 R82 R83: library part RES, "Resistor"
L1: library part IND, "Inductor"
P1: "Header, 6-Pin"
P2: "Header, 2-Pin"
U1 U2 U3 U4 U5 U6 U7 U8 U9 U10 U11 U12 U13 U14 U15 U16 U17: "shift reg"

## Via types
v1: diameter 50, hole 28, Top Layer to Bottom Layer, 2 vias

## Nets (pads, with @x,y where several pads share a name; then routed paths per layer and width w, separated by ;. In a path a pad name is that pad's centre, name@x,y a point inside that pad or via, vN(x,y) a via of type N, cw(c..) or ccw(c..) an arc to the next point about the centre after c; other vN are vias at no path point)
CP: J24.1 J24.2 J25.1 J25.2 J26.1 J26.2 J27.1 J27.2 J28.1 J28.2 J29.1 J29.2 J30.1 J30.2 J31.1 J31.2 J32.1 J32.2 J33.1 J33.2 J34.1 J34.2 J35.1 J35.2 J36.1 J36.2 J37.1 J37.2 J38.1 J38.2 J39.1 J39.2 J40.1 J40.2 J41.1 J41.2 J42.1 J42.2 J43.1 J43.2 J44.1 J44.2 J45.1 J45.2 J46.1 J46.2 P1.4 U1.3 U2.3 U3.3 U4.3 U5.3 U6.3 U7.3 U8.3 U9.3 U10.3 U11.3 U12.3 U13.3 U14.3 U15.3 U16.3 U17.3 | length 31684.4
  Bottom Layer w20: P1.4@-380,3105 -371,3114 -241.57,3114 -204.57,3151 41.08,3151 76.08,3116 442.07,3116 449.07,3109 3037.57,3109 3065.57,3081 3312,3081 3366.43,3026.57 3473.92,3026.57 3501.35,3054 3629.09,3054 3651.08,3032.01 3752.01,3032.01 3800,3080 4472,3080 4496,3104 4596.78,3104 4629,3071.78 4629,1060 4339,770 3902,770 ; U2.3 223.14,3639 302,3560.14 298.18,3556.32 298.18,3521.68 302,3517.86 J42.2@302,3363 ; U1.3 301.82,2599 315.82,2585 315.82,956.18 502,770 955,770 ; J42.1@300,3221.93 J43.2 ; U4.3 843.14,3639 896,3586.14 J31.2@896,3336 ; U3.3 905,2599 961,2543 961,954 J30.2@965,950 ; J31.1 972.86,3224.07 J44.2 ; J30.1 955,770 ; U6.3 1429,3639 1475,3593 J39.2@1475,3384 ; U5.3 1491,2599 1535,2555 J29.2@1535,950 ; J39.1 1486.93,3224.07 1489.07,3221.93 J41.2 ; J29.1 1540,770 ; U17.3 1801.89,5559 1767,5524.11 1767,5404 1835,5336 1835,4833 1919,4749 1919,4047 2035.82,3930.18 2035.82,3495.18 ; U8.3 2031.82,3639 ; J32.1 J46.2@2072.86,3224.07 ; J32.2 1995,3417 2035.82,3457.82 2035.82,3495.18 ; 2036,3495 2035.82,3495.18 ; U7.3 2102,2599 2137,2564 J28.2@2137,984 ; J28.1 2140,774 2136,770 ; U10.3 2588.14,3639 2650.17,3576.97 ; U9.3@2636,2598 2693,2598 2723,2568 J27.2@2723,988 ; J38.2@2651.33,3354 2651.33,3576.97 ; J38.1 2727.86,3224.07 J33.2 ; J27.1 2720,773 2723,770 ; U12.3 3203.14,3639 3235.82,3606.32 3235.82,3521.68 3187,3472.86 J34.2@3187,3357.93 ; J34.1 3230.14,3224.07 3228,3221.93 J45.2 ; 3222.51,2649 3283,2649 3322,2610 J26.2@3322,950 ; J26.1 3324,837.07 3324,770 ; U14.3 3803.14,3639 3852,3590.14 J36.2@3852,3336 ; 3802.51,2699 3810.7,2690.81 3851.33,2690.81 3899,2643.14 J25.2@3899,978 ; J36.1 3897,3224.07 3897,3220.93 3893,3216.93 J37.2 ; J25.1 3905,773 3902,770 ; U16.3 4363.14,3639 4411,3591.14 J40.2@4411,3336 ; 4345,779 J24.1 ; J24.2@4357,984 4439,1066 4439,2663.14 4411.33,2690.81 4370.7,2690.81 4362.51,2699 ; J40.1 4443.86,3224.07 4443,3224.93 J35.1 ; 955,770 1540,770 ; 1540,770 2136,770 ; 2136,770 2723,770 ; 2723,770 3324,770 ; 3324,770 3902,770
D1: U2.9 U4.2 | length 1059.4
  Bottom Layer w20: U2.9 491,3889 530.55,3849.45 530.55,3367.96 551.82,3346.69 625.26,3346.69 690.55,3411.98 690.55,3517.67 U4.2@761.89,3589
D2: U4.9 U6.2 | length 1029.8
  Bottom Layer w20: U4.9 999.68,3880.81 1040.3,3880.81 1111,3810.11 1111,3344 1113.69,3346.69 1216.82,3346.69 1281.1,3410.97 1281.1,3548.22 1313.7,3580.81 U6.2@1344,3580.81
D3: U6.9 U8.2 | length 1038.7
  Bottom Layer w20: U6.9 1565,3889 1573.19,3880.81 1600.3,3880.81 1662,3819.11 1662,3416.51 1731.82,3346.69 1793.69,3346.69 1848.5,3401.5 1848.5,3401.94 1871.65,3425.09 1871.65,3538.77 1921.89,3589 U8.2
D4: U8.9 U10.2 | length 1082.3
  Bottom Layer w20: U8.9 2159.68,3880.81 2200.3,3880.81 2302,3779.11 2302,3369 2331,3340 2455,3340 2470,3355 2470,3552.11 2506.89,3589 U10.2
D5: U10.9 U12.2 | length 1130
  Bottom Layer w20: U10.9 2807.81,3889 2816,3880.81 2816,3490.28 2786,3460.28 2786,3346.69 2989.26,3346.69 3052.76,3410.19 3052.76,3519.87 U12.2@3121.89,3589
D6: U12.9 U14.2 | length 1037.1
  Bottom Layer w20: U12.9@3366.83,3889.81 3387.15,3889.81 3400.3,3880.81 3481,3800.11 3481,3377.51 3511.82,3346.69 3585.26,3346.69 3643.31,3404.74 3643.31,3523.31 3709,3589 U14.2
D7: U14.9 U16.2 | length 1039.4
  Bottom Layer w20: U14.9 3959.68,3880.81 4000.3,3880.81 4073.86,3807.26 4073.86,3364.65 4091.82,3346.69 4170.26,3346.69 4249.2,3425.64 4249.2,3569.2 4269,3589 U16.2
D8: U1.2 U16.9 | length 9486.9
  Bottom Layer w20: U1.2 194.2,2549 169.2,2524 169.2,2446.46 180,2435.66 180,904 443,641 4343,641 4711,1009 4711,3236.57 4602,3345.57 4602,3839.11 4560.3,3880.81 4519.68,3880.81 U16.9
D9: U1.9 U3.2 | length 3735.3
  Bottom Layer w20: U1.9 488,2849 520,2817 520,986 525,981 634,981 772,1119 772,2497 789.2,2514.2 789.2,2516.32 821.89,2549 U3.2
D10: U3.9 U5.2 | length 3710.2
  Bottom Layer w20: U3.9 1092.11,2849 1124.8,2816.32 1124.8,2812 1124.8,2763.2 1191,2697 1191,2483 1198,2476 1113,2391 1113,1045.51 1151.82,1006.69 1216.82,1006.69 1363,1152.87 1363,2523 1389,2549 U5.2
D11: U5.9 U7.2 | length 3695.3
  Bottom Layer w20: U5.9 1678.25,2849 1711.65,2815.59 1711.65,2185.1 1716,2180.76 1716,1799.75 1711.65,1795.4 1711.65,1006.86 1731.82,986.69 1796.82,986.69 1969.2,1159.08 1969.2,2529.2 1989,2549 U7.2
D12: U7.9 U9.2 | length 3753.9
  Bottom Layer w20: U7.9 2274.25,2849 2314.25,2809 2314.25,2766.69 2388,2692.94 2388,2471.75 2302.2,2385.96 2302.2,1016.31 2331.82,986.69 2396.82,986.69 2548,1137.87 2548,2531 2566,2549 U9.2
D13: U9.9 U11.2 | length 3747.8
  Bottom Layer w20: U9.9 2866.76,2849 2892.76,2823 2892.76,1005.76 2911.82,986.69 2976.82,986.69 3146,1155.87 3146,2578 3167,2599 3222.51,2599
D14: U11.9 U13.2 | length 3834.5
  Bottom Layer w20: 3419,2898 3472,2898 3494.25,2875.75 3494.25,2396.89 3483.31,2385.96 3483.31,1015.2 3511.82,986.69 3576.82,986.69 3725,1134.87 3725,2612.11 3753.7,2640.81 3794.32,2640.81 3802.51,2649
D15: U13.9 U15.2 | length 3884.4
  Bottom Layer w20: 3991.49,2949 3999.68,2940.81 4040.3,2940.81 4073.86,2907.26 4073.86,1004.65 4091.82,986.69 4156.82,986.69 4313.86,1143.73 4313.86,2557.03 4289.2,2581.68 4289.2,2616.32 4321.89,2649 4362.51,2649
D16: U15.9 U17.2 | length 5970.4
  Top Layer w20: v1@4572,3047 v1(4574,3049) 4574,3415 v1(4657,3498)
  Bottom Layer w20: 1888,5512 1915.82,5539.82 1915.82,5826.32 1949.5,5860 4336,5860 4669,5527 4669,3510 v1(4657,3498) ; U15.9 4551.49,3031.49 4574,3054 v1(4574,3049)
DATA: J50.1 J50.2 P1.2 U2.2 | length 842.9
  Bottom Layer w20: P1.2 -79,3300 -10,3231 123.07,3231 J50.1 ; J50.2 100,3387.93 100,3547.11 133.7,3580.81 174.32,3580.81 U2.2
GND: C1.N C2.1 C3.N D1.2 J51.1 J51.2 J52.1 J52.2 J53.1 J53.2 J54.1 J54.2 J55.1 J55.2 J56.1 J56.2 J57.1 J57.2 J58.1 J58.2 J59.1 J59.2 P1.6 P2.2 R74.2 R76.2 R77.2 R78.2 R79.2 R80.2 R81.2 R82.2 R83.1 T1.S T2.S T3.S T4.S T5.S T6.S T7.S T8.S U1.8 U2.8 U3.8 U4.8 U5.8 U6.8 U7.8 U8.8 U9.8 U10.8 U11.8 U12.8 U13.8 U14.8 U15.8 U16.8 U17.8 U18.4 | length 4428.1
  Bottom Layer w20: D1.2 -197,4260 -110,4173 -110,3892.57 -65,3847.57 -65,3736 -81,3720 -165.72,3720 -199.37,3753.66 C2.1 -199.37,3826.44 -237.93,3865 U18.4 ; -479.37,3772.36 -331.01,3624 -434,3624 -488,3570 -488,2662 -484.5,2658.5 J54.1 ; J55.1 169.07,2849 U1.8 ; R76.2@162.6,5084.85 T2.S ; T1.S 362.6,5089.85 R77.2 ; T3.S 842.6,5094.85 R78.2 ; U3.8 699.86,3011.65 565.7,3011.65 540.62,2986.57 409.51,2986.57 394.15,3001.93 J55.2 116.93,3035 ; T4.S 1442.6,5084.85 R79.2 ; R83.1 2022.6,5094.84 T8.S 2022.6,5131.8 2069.42,5178.62 ; 2167,5366 2167,5405.57 2183.07,5421.64 J52.2 ; J52.1 J53.2 ; T7.S 2622.6,5089.85 R82.2 ; R81.2@3202.6,5089.85 T6.S ; T5.S 3802.6,5089.85 R80.2 ; 116.93,3035 58.07,3035 116.93,3035
NetA1_1: A1.1 R1.1 | length 72.4
  Bottom Layer w20: R1.1 A1.1
NetA2_1: A2.1 R5.1 | length 73.5
  Bottom Layer w20: R5.1 A2.1
NetA3_1: A3.1 R9.1 | length 73.5
  Bottom Layer w20: R9.1 A3.1
NetA4_1: A4.1 R13.1 | length 84.1
  Bottom Layer w20: R13.1 A4.1
NetA5_1: A5.1 R2.1 | length 76.9
  Bottom Layer w20: R2.1 A5.1
NetA6_1: A6.1 R6.1 | length 85.2
  Bottom Layer w20: R6.1 A6.1
NetA7_1: A7.1 R10.1 | length 75.7
  Bottom Layer w20: R10.1 A7.1
NetA8_1: A8.1 R14.1 | length 86.3
  Bottom Layer w20: R14.1 A8.1
NetA9_1: A9.1 R3.1 | length 96.8
  Bottom Layer w20: R3.1 580,1114 590.55,1124.55 A9.1
NetA10_1: A10.1 R7.1 | length 87.4
  Bottom Layer w20: R7.1 580,1714 590.55,1724.55 A10.1
NetA11_1: A11.1 R11.1 | length 97.9
  Bottom Layer w20: R11.1 580,2294 590.55,2304.55 A11.1
NetA12_1: A12.1 R15.1 | length 88.5
  Bottom Layer w20: R15.1 580,2894 590.55,2904.55 A12.1
NetA13_1: A13.1 R4.1 | length 99
  Bottom Layer w20: R4.1 580,3474 590.55,3484.55 A13.1
NetA14_1: A14.1 R8.1 | length 89.6
  Bottom Layer w20: R8.1 580,4074 590.55,4084.55 A14.1
NetA15_1: A15.1 R12.1 | length 100.1
  Bottom Layer w20: R12.1 580,4654 590.55,4664.55 A15.1
NetA16_1: A16.1 R16.1 | length 90.7
  Bottom Layer w20: R16.1 580,5254 590.55,5264.55 A16.1
NetA17_1: A17.1 R17.1 | length 72.9
  Bottom Layer w20: R17.1 1180,1178.9 A17.1
NetA18_1: A18.1 R21.1 | length 83.4
  Bottom Layer w20: R21.1 1180,1769.45 A18.1
NetA19_1: A19.1 R25.1 | length 94
  Bottom Layer w20: R25.1 1180,2360 A19.1
NetA20_1: A20.1 R29.1 | length 84.6
  Bottom Layer w20: R29.1 1180,2950.55 A20.1
NetA21_1: A21.1 R18.1 | length 95.1
  Bottom Layer w20: R18.1 1180,3541.1 A21.1
NetA22_1: A22.1 R22.1 | length 85.7
  Bottom Layer w20: R22.1 1180,4131.65 A22.1
NetA23_1: A23.1 R26.1 | length 76.2
  Bottom Layer w20: R26.1 1180,4722.2 A23.1
NetA24_1: A24.1 R30.1 | length 86.3
  Bottom Layer w20: R30.1 A24.1@1180,5312.76 ; A24.1@1180,5313.86 A24.1
NetA25_1: A25.1 R19.1 | length 97.3
  Bottom Layer w20: R19.1 1760,1114 1771.65,1125.65 A25.1
NetA26_1: A26.1 R23.1 | length 87.8
  Bottom Layer w20: R23.1 1760,1714 1771.65,1725.65 A26.1
NetA27_1: A27.1 R27.1 | length 98.4
  Bottom Layer w20: R27.1 1760,2294 1771.65,2305.65 A27.1
NetA28_1: A28.1 R31.1 | length 88.9
  Bottom Layer w20: R31.1 1760,2894 1771.65,2905.65 A28.1
NetA29_1: A29.1 R20.1 | length 99.5
  Bottom Layer w20: R20.1 1760,3474 1771.65,3485.65 A29.1
NetA30_1: A30.1 R24.1 | length 90
  Bottom Layer w20: R24.1 1760,4074 1771.65,4085.65 A30.1
NetA31_1: A31.1 R28.1 | length 80.6
  Bottom Layer w20: R28.1 1760,4674 1771.65,4685.65 A31.1
NetA32_1: A32.1 R32.1 | length 91.1
  Bottom Layer w20: R32.1 1760,5254 1771.65,5265.65 A32.1
NetA33_1: A33.1 R33.1 | length 93.4
  Bottom Layer w20: R33.1 2360,1177.8 A33.1
NetA34_1: A34.1 R37.1 | length 83.9
  Bottom Layer w20: R37.1 2360,1768.35 A34.1
NetA35_1: A35.1 R41.1 | length 94.5
  Bottom Layer w20: R41.1 2360,2358.9 A35.1
NetA36_1: A36.1 R45.1 | length 85
  Bottom Layer w20: R45.1 2360,2949.45 A36.1
NetA37_1: A37.1 R34.1 | length 95.6
  Bottom Layer w20: R34.1 2360,3540 A37.1
NetA38_1: A38.1 R38.1 | length 86.1
  Bottom Layer w20: R38.1 2360,4130.55 A38.1
NetA39_1: A39.1 R42.1 | length 76.7
  Bottom Layer w20: R42.1 2360,4721.1 A39.1
NetA40_1: A40.1 R46.1 | length 86.3
  Bottom Layer w20: R46.1 A40.1@2360,5311.65 ; A40.1@2360,5313.86 A40.1
NetA41_1: A41.1 R35.1 | length 97.7
  Bottom Layer w20: R35.1 2940,1114 2952.76,1126.76 A41.1
NetA42_1: A42.1 R39.1 | length 88.3
  Bottom Layer w20: R39.1 2940,1714 2952.76,1726.76 A42.1
NetA43_1: A43.1 R43.1 | length 98.8
  Bottom Layer w20: R43.1 2940,2294 2952.76,2306.76 A43.1
NetA44_1: A44.1 R47.1 | length 89.4
  Bottom Layer w20: R47.1 2940,2894 2952.76,2906.76 A44.1
NetA45_1: A45.1 R36.1 | length 99.9
  Bottom Layer w20: R36.1 2940,3474 2952.76,3486.76 A45.1
NetA46_1: A46.1 R40.1 | length 90.5
  Bottom Layer w20: R40.1 2940,4074 2952.76,4086.76 A46.1
NetA47_1: A47.1 R44.1 | length 81
  Bottom Layer w20: R44.1 2940,4674 2952.76,4686.76 A47.1
NetA48_1: A48.1 R48.1 | length 91.6
  Bottom Layer w20: R48.1 2940,5254 2952.76,5266.76 A48.1
NetA49_1: A49.1 R49.1 | length 93.8
  Bottom Layer w20: R49.1 3540,1176.69 A49.1
NetA50_1: A50.1 R53.1 | length 84.4
  Bottom Layer w20: R53.1 3540,1767.24 A50.1
NetA51_1: A51.1 R57.1 | length 94.9
  Bottom Layer w20: R57.1 3540,2357.8 A51.1
NetA52_1: A52.1 R61.1 | length 85.5
  Bottom Layer w20: R61.1 3540,2948.35 A52.1
NetA53_1: A53.1 R50.1 | length 96
  Bottom Layer w20: R50.1 3540,3538.9 A53.1
NetA54_1: A54.1 R54.1 | length 86.6
  Bottom Layer w20: R54.1 3540,4129.45 A54.1
NetA55_1: A55.1 R58.1 | length 77.1
  Bottom Layer w20: R58.1 3540,4720 A55.1
NetA56_1: A56.1 R62.1 | length 86.3
  Bottom Layer w20: R62.1 A56.1@3540,5310.55 ; A56.1@3540,5313.86 A56.1
NetA57_1: A57.1 R51.1 | length 98.2
  Bottom Layer w20: R51.1 4120,1114 4133.86,1127.86 A57.1
NetA58_1: A58.1 R55.1 | length 88.7
  Bottom Layer w20: R55.1 4120,1714 4133.86,1727.86 A58.1
NetA59_1: A59.1 R59.1 | length 99.3
  Bottom Layer w20: R59.1 4120,2294 4133.86,2307.86 A59.1
NetA60_1: A60.1 R63.1 | length 89.8
  Bottom Layer w20: R63.1 4120,2894 4133.86,2907.86 A60.1
NetA61_1: A61.1 R52.1 | length 100.4
  Bottom Layer w20: R52.1 4120,3474 4133.86,3487.86 A61.1
NetA62_1: A62.1 R56.1 | length 90.9
  Bottom Layer w20: R56.1 4120,4074 4133.86,4087.86 A62.1
NetA63_1: A63.1 R60.1 | length 101.5
  Bottom Layer w20: R60.1 4120,4654 4133.86,4667.86 A63.1
NetA64_1: A64.1 R64.1 | length 92
  Bottom Layer w20: R64.1 4120,5254 4133.86,5267.86 A64.1
NetC2_2: C2.2 U18.3 | length 191.2
  Bottom Layer w20: U18.3 -197.01,3915 -120.63,3838.62 C2.2
NetCAT1_1: CAT1.1 T2.D | length 82.9
  Bottom Layer w20: CAT1.1 200,5310.71 T2.D
NetCAT2_1: CAT2.1 T1.D | length 84.2
  Bottom Layer w20: CAT2.1 400,5307.56 T1.D
NetCAT3_1: CAT3.1 T3.D | length 84
  Bottom Layer w20: T3.D 880,5308.03 CAT3.1
NetCAT4_1: CAT4.1 T4.D | length 78
  Bottom Layer w20: T4.D@1476.38,5235.87 CAT4.1
NetCAT5_1: CAT5.1 T8.D | length 84.5
  Bottom Layer w20: T8.D 2060,5306.93 CAT5.1
NetCAT6_1: CAT6.1 T7.D | length 82.7
  Bottom Layer w20: CAT6.1 2660,5311.34 T7.D
NetCAT7_1: CAT7.1 T6.D | length 84.9
  Bottom Layer w20: T6.D 3240,5266 3248.03,5274.03 CAT7.1
NetCAT8_1: CAT8.1 T5.D | length 82.2
  Bottom Layer w20: CAT8.1 3840,5312.44 T5.D
NetD1_1: D1.1 L1.1 U18.2 | length 589.8
  Bottom Layer w30: D1.1 -288.74,4131.26 L1.1 -204,4140 -155,4091 -155,3985 -175,3965 U18.2
NetR1_2: R1.2 U1.4 | length 1788.2
  Bottom Layer w20: R1.2 41.44,1052.44 107,1118 107,1924.16 140,1957.16 140,2419.09 107,2452.09 107,2581 175,2649 U1.4
NetR2_2: R2.2 U2.4 | length 383.1
  Bottom Layer w20: R2.2 36.44,3412.44 60,3436 60,3640 109,3689 U2.4@149,3689
NetR3_2: R3.2 U3.4 | length 1772.6
  Bottom Layer w20: R3.2 606,1032.44 732,1158.44 732,2559.11 821.89,2649 U3.4
NetR4_2: R4.2 U4.4 | length 440.3
  Bottom Layer w20: R4.2 614.44,3392.44 650.55,3428.55 650.55,3590.55 749,3689 U4.4
NetR5_2: R5.2 U1.5 | length 1257.6
  Bottom Layer w20: R5.2 24.44,1632.44 67,1675 67,1940.73 100,1973.73 100,2402.52 67,2435.52 67,2607 159,2699 U1.5
NetR6_2: R6.2 U2.5 | length 348.1
  Bottom Layer w20: R6.2 0,3942.64 25,3917.64 25,3841.86 126.86,3740 U2.5@170,3740
NetR7_2: R7.2 U3.5 | length 1232.5
  Bottom Layer w20: R7.2 606,1632.44 692,1718.44 692,2586 805,2699 U3.5
NetR8_2: R8.2 U4.5 | length 453.1
  Bottom Layer w20: R8.2 579.99,3778.01 619,3739 U4.5
NetR9_2: R9.2 U1.6 | length 721.3
  Bottom Layer w20: R9.2 9.36,2241.81 28.17,2241.81 60,2273.64 60,2385.96 27,2418.96 27,2646 130,2749 U1.6
NetR10_2: R10.2 U2.6 | length 907.2
  Bottom Layer w20: R10.2 65,4527.43 65,3858.43 134.43,3789 U2.6
NetR11_2: R11.2 U3.6 | length 706.4
  Bottom Layer w20: R11.2@583.43,2209 600,2209 650.55,2259.55 650.55,2602.57 ; 652,2598.45 652,2602.57 798.43,2749 U3.6
NetR12_2: R12.2 U4.6 | length 943.9
  Bottom Layer w20: R12.2 579.99,4235.24 655.55,4159.68 655.55,3819.45 686,3789 U4.6
NetR13_2: R13.2 U1.7 | length 248.1
  Bottom Layer w20: R13.2 32.44,2812.44 45.88,2799 U1.7
NetR14_2: R14.2 U2.7 | length 1433.4
  Bottom Layer w20: R14.2 -0.01,4850.01 105,4745 105,3875 141,3839 U2.7
NetR15_2: R15.2 U3.7 | length 288.1
  Bottom Layer w20: R15.2 604.87,2812.44 618.31,2799 U3.7
NetR16_2: R16.2 U4.7 | length 1450.8
  Bottom Layer w20: 577.22,5155.22 577.22,5070.78 717,4931 717,3854 732,3839 U4.7
NetR17_2: R17.2 U5.4 | length 1744.3
  Bottom Layer w20: R17.2 1206,1052.44 1323,1169.44 1323,2570.11 1401.89,2649 U5.4
NetR18_2: R18.2 U6.4 | length 418.7
  Bottom Layer w20: R18.2 1206,3392.44 1241.1,3427.54 1241.1,3621.1 1309,3689 U6.4
NetR19_2: R19.2 U7.4 | length 1780.2
  Bottom Layer w20: R19.2 1786,1032.44 1929.2,1175.65 1929.2,2589.2 1989,2649 U7.4
NetR20_2: R20.2 U8.4 | length 424.9
  Bottom Layer w20: R20.2 1782.44,3392.44 1831.65,3441.65 1831.65,3611.65 1909,3689 U8.4
NetR21_2: R21.2 U5.5 | length 1239.5
  Bottom Layer w20: R21.2 1206,1632.44 1283,1709.44 1283,2623 1359,2699 U5.5
NetR22_2: R22.2 U6.5 | length 413.1
  Bottom Layer w20: R22.2 1179.99,3778.01 1219,3739 U6.5
NetR23_2: R23.2 U7.5 | length 1237.2
  Bottom Layer w20: R23.2 1786,1632.44 1889.2,1735.65 1889.2,2611.2 1977,2699 U7.5
NetR24_2: R24.2 U8.5 | length 409.7
  Bottom Layer w20: R24.2 1759.99,3818.01 1839,3739 U8.5
NetR25_2: R25.2 U5.6 | length 726.4
  Bottom Layer w20: R25.2 1206,2212.44 1243,2249.44 1243,2662 1330,2749 U5.6
NetR26_2: R26.2 U6.6 | length 934.4
  Bottom Layer w20: R26.2 1179.99,4218.72 1241.1,4157.61 1241.1,3815.9 1268,3789 U6.6
NetR27_2: R27.2 U7.6 | length 735.9
  Bottom Layer w20: R27.2 1786,2212.44 1849.2,2275.65 1849.2,2670.2 1928,2749 U7.6
NetR28_2: R28.2 U8.6 | length 945.6
  Bottom Layer w20: R28.2 1759.99,4229.27 1831.65,4157.61 1831.65,3820.35 1863,3789 U8.6
NetR29_2: R29.2 U5.7 | length 268.1
  Bottom Layer w20: R29.2 1206,2812.44 1219.44,2799 U5.7
NetR30_2: R30.2 U6.7 | length 1507.5
  Bottom Layer w20: R30.2 1179.99,4890.01 1355,4715 1355,4163.8 1281.1,4089.9 1281.1,3856.9 1299,3839 U6.7
NetR31_2: R31.2 U7.7 | length 288.1
  Bottom Layer w20: R31.2 1786,2812.44 1799.44,2799 U7.7
NetR32_2: R32.2 U8.7 | length 1452.8
  Bottom Layer w20: R32.2 1759.99,4819.82 1874,4705.81 1874,3867 1902,3839 U8.7
NetR33_2: R33.2 U9.4 | length 1777.7
  Bottom Layer w20: R33.2 2386,1032.44 2508,1154.44 2508,2598 2559,2649 U9.4
NetR34_2: R34.2 U10.4 | length 426.1
  Bottom Layer w20: R34.2 2386,3392.44 2422.2,3428.65 2422.2,3626.2 2485,3689 U10.4
NetR35_2: R35.2 U11.4 | length 1833.1
  Bottom Layer w20: R35.2 2966,1032.44 3106,1172.44 3106,2641 3164,2699 3222.51,2699
NetR36_2: R36.2 U12.4 | length 442.6
  Bottom Layer w20: R36.2 2978.44,3392.44 3012.76,3426.76 3012.76,3592.76 3109,3689 U12.4
NetR37_2: R37.2 U9.5 | length 1231.8
  Bottom Layer w20: R37.2 2386,1632.44 2468,1714.44 2468,2615 2552,2699 U9.5
NetR38_2: R38.2 U10.5 | length 421.6
  Bottom Layer w20: R38.2 2359.99,3772.01 2393,3739 U10.5
NetR39_2: R39.2 U11.5 | length 1288.9
  Bottom Layer w20: R39.2 2966,1632.44 3066,1732.44 3066,2661 3154,2749 3222.51,2749
NetR40_2: R40.2 U12.5 | length 416.2
  Bottom Layer w20: R40.2 2939.99,3841.01 3042,3739 U12.5
NetR41_2: R41.2 U9.6 | length 707.7
  Bottom Layer w20: R41.2 2386,2212.44 2428,2254.44 2428,2635 2542,2749 U9.6
NetR42_2: R42.2 U10.6 | length 948.2
  Bottom Layer w20: R42.2 2359.99,4219.82 2422.2,4157.61 2422.2,3799.8 2433,3789 U10.6
NetR43_2: R43.2 U11.6 | length 782.4
  Bottom Layer w20: R43.2 2966,2212.44 3026,2272.44 3026,2711 3114,2799 3222.51,2799
NetR44_2: R44.2 U12.6 | length 959.8
  Bottom Layer w20: R44.2 2939.99,4230.37 3012.76,4157.61 3012.76,3829.24 3053,3789 U12.6
NetR45_2: R45.2 U9.7 | length 268.1
  Bottom Layer w20: R45.2 2386,2812.44 2399.44,2799 U9.7
NetR46_2: R46.2 U10.7 | length 1454.8
  Bottom Layer w20: R46.2 2359.99,4949.01 2462.2,4846.8 2462.2,3849.8 2473,3839 U10.7
NetR47_2: R47.2 U11.7 | length 297.7
  Bottom Layer w20: R47.2 2966,2812.44 3002.56,2849 3222.51,2849
NetR48_2: R48.2 U12.7 | length 1469.3
  Bottom Layer w20: R48.2 2939.99,4870.44 3052.76,4757.68 3052.76,3874.24 3088,3839 U12.7
NetR49_2: R49.2 U13.4 | length 1863.6
  Bottom Layer w20: R49.2 3566,1032.44 3685,1151.44 3685,2705 3729,2749 3782.51,2749
NetR50_2: R50.2 U14.4 | length 440.3
  Bottom Layer w20: R50.2 3574.44,3392.44 3603.31,3421.31 3603.31,3583.31 3709,3689 U14.4
NetR51_2: R51.2 U15.4 | length 1893.3
  Bottom Layer w20: R51.2 4146,1032.44 4273.86,1160.3 4273.86,2419.09 4238,2454.95 4238,2678 4309,2749 4362.51,2749
NetR52_2: R52.2 U16.4 | length 434.9
  Bottom Layer w20: R52.2 4159.44,3392.44 4193.86,3426.86 4193.86,3613.86 4269,3689 U16.4
NetR53_2: R53.2 U13.5 | length 1317.4
  Bottom Layer w20: R53.2 3566,1632.44 3645,1711.44 3645,2721.57 3722.43,2799 3782.51,2799
NetR54_2: R54.2 U14.5 | length 432.6
  Bottom Layer w20: R54.2 3539.99,3813.01 3614,3739 U14.5
NetR55_2: R55.2 U15.5 | length 1347.1
  Bottom Layer w20: R55.2 4146,1632.44 4233.86,1720.3 4233.86,2402.52 4198,2438.38 4198,2694.57 4302.43,2799 4362.51,2799
NetR56_2: R56.2 U16.5 | length 412.6
  Bottom Layer w20: R56.2 4119.99,3813.01 4194,3739 U16.5
NetR57_2: R57.2 U13.6 | length 791.3
  Bottom Layer w20: R57.2 3566,2212.44 3605,2251.44 3605,2738.14 3715.86,2849 3782.51,2849
NetR58_2: R58.2 U14.6 | length 949.2
  Bottom Layer w20: R58.2 3539.99,4220.92 3603.31,4157.61 3603.31,3856.69 3671,3789 U14.6
NetR59_2: R59.2 U15.6 | length 821
  Bottom Layer w20: R59.2 4146,2212.44 4193.86,2260.3 4193.86,2385.96 4158,2421.81 4158,2711.14 4295.86,2849 4362.51,2849
NetR60_2: R60.2 U16.6 | length 929.7
  Bottom Layer w20: R60.2 4119.99,4231.47 4193.86,4157.61 4193.86,3811.14 4216,3789 U16.6
NetR61_2: R61.2 U13.7 | length 278.4
  Bottom Layer w20: R61.2 3605.44,2812.44 3691.15,2898.15 3738.92,2898.15 3739.77,2899 3782.51,2899
NetR62_2: R62.2 U14.7 | length 1475.4
  Bottom Layer w20: R62.2 3539.99,4945.01 3643.31,4841.69 3643.31,3873.26 3677.57,3839 U14.7
NetR63_2: R63.2 U15.7 | length 278.4
  Bottom Layer w20: R63.2 4146,2812.44 4232.56,2899 4362.51,2899
NetR64_2: R64.2 U16.7 | length 1449.8
  Bottom Layer w20: R64.2 4119.99,4957.01 4233.86,4843.14 4233.86,3872.14 4267,3839 U16.7
NetR65_1: R65.1 R83.2 T8.G | length 107.7
  Bottom Layer w20: R65.1 T8.G
NetR65_2: R65.2 U17.14 | length 792.5
  Bottom Layer w20: U17.14 2229,5559 2244.57,5543.43 2244.57,5426.57 2207,5389 2207,5055 2171.99,5019.99 R65.2
NetR66_1: R66.1 R76.1 T2.G | length 97.8
  Bottom Layer w20: R66.1@237.4,5029.96 T2.G
NetR66_2: R66.2 U17.4 | length 4038.8
  Bottom Layer w20: R66.2 287.56,4968.44 307,4949 501,4949 530.55,4978.55 530.55,5338.71 565.7,5373.86 615.4,5373.86 654,5335.26 654,5079 865,4868 991,4868 1114,4991 1114,5368 1155,5409 1203,5409 1241.1,5370.9 1241.1,4900.9 1357,4785 1546,4785 1698,4937 1698,5539 1768,5609 U17.4
NetR67_1: R67.1 R82.1 T7.G | length 167.4
  Bottom Layer w20: R82.1 2692.56,5101 2697.4,5096.16 T7.G R67.1@2697.4,5024.84
NetR67_2: R67.2 U17.13 | length 1134.8
  Bottom Layer w20: U17.13 2481,5609 2512,5578 2512,5091.63 2583.62,5020.01 R67.2
NetR68_1: R68.1 R77.1 T1.G | length 114
  Bottom Layer w20: R68.1 431.81,5029.37 431.81,5122.17 T1.G
NetR68_2: R68.2 U17.5 | length 3704.7
  Bottom Layer w20: 485.75,5039.38 485.75,5359.05 547.7,5421 634,5421 705,5350 705,5088 868,4925 959,4925 1042,5008 1042,5364 1136,5458 1223,5458 1284,5397 1284,4926 1371,4839 1526,4839 1658,4971 1658,5555.57 1761.43,5659 U17.5
NetR69_1: R69.1 R81.1 T6.G | length 114.8
  Bottom Layer w20: R69.1 R81.1 3277.4,5079.84 T6.G
NetR69_2: R69.2 U17.12 | length 1734.7
  Bottom Layer w20: U17.12 2996,5659 3088,5567 3088,5083 3158.56,5012.44 R69.2@3214.88,5012.44
NetR70_1: R70.1 R78.1 T3.G | length 97.8
  Bottom Layer w20: T3.G R70.1 R70.1
NetR70_2: R70.2 U17.6 | length 2488.2
  Bottom Layer w20: R70.2 991.99,5029.99 1002,5040 1002,5383 1129,5510 1235,5510 1327,5418 1327,4948 1391,4884 1514,4884 1618,4988 1618,5572.14 1754.86,5709 U17.6
NetR71_1: R71.1 R80.1 T5.G | length 114.8
  Bottom Layer w20: R71.1 R80.1 3877.4,5079.84 T5.G
NetR71_2: R71.2 U17.11 | length 2249.7
  Bottom Layer w20: U17.11 3367,5709 3713,5363 3713,5062 3759.99,5015.01 R71.2
NetR72_1: R72.1 R79.1 T4.G | length 99.8
  Bottom Layer w20: R72.1@1512.44,5030 1517.4,5034.96 T4.G
NetR72_2: R72.2 U17.7 | length 888.8
  Bottom Layer w20: R72.2@1578,5035 1578,5304 1578,5588.71 1748.29,5759 U17.7
NetR73_2: R73.2 U18.1 U18.7 U18.8 | length 416.7
  Bottom Layer w30: R73.2@-524.37,4015 U18.8 -344,4015 ; U18.7 -362,3965 -353,3974 -353,4006 -344,4015 ; U18.1 -344,4015
NetR74_1: R74.1 R75.1 U18.5 | length 153.3
  Bottom Layer w20: U18.5 -422.43,3849 -403,3849 -400.63,3846.63 R74.1 R75.1
OE: J47.1 J47.2 J48.1 J48.2 J49.1 J49.2 P1.5 U17.15 | length 9685.9
  Bottom Layer w20: P1.5 -299,3000 -188,3111 24.52,3111 59.52,3076 376.65,3076 426.08,3026.57 513.92,3026.57 556.35,3069 888.65,3069 931.08,3026.57 1018.92,3026.57 1061.35,3069 1458.65,3069 1501.08,3026.57 1588.92,3026.57 1631.35,3069 1988.65,3069 2031.08,3026.57 2118.92,3026.57 2161.35,3069 2643.65,3069 2686.08,3026.57 2773.92,3026.57 2816.35,3069 3021,3069 3103.43,2986.57 3490.49,2986.57 3515.57,3011.65 3588.35,3011.65 3640.35,2959.65 J47.1 ; U17.15 2110,5509 2121,5498 2121,5452.78 1979.8,5311.59 1979.8,5049.2 2054.75,4974.25 2182.81,4974.25 2247,5038.43 2247,5350 2322,5425 2392.48,5425 2465,5352.48 2465,5011 2546,4930 2822,4930 2892.76,5000.76 2892.76,5338.71 2927.9,5373.86 2977.61,5373.86 3012.76,5338.71 3012.76,4854.24 3278.18,4588.82 3278.18,3493.82 3355,3417 J49.2 ; J49.1 3390.14,3224.07 3388,3221.93 J48.2 ; J48.1 3435.93,3094 J47.2@3694.5,3094
STR: J1.1 J1.2 J2.1 J2.2 J3.1 J3.2 J4.1 J4.2 J5.1 J5.2 J6.1 J6.2 J7.1 J7.2 J8.1 J8.2 J9.1 J9.2 J10.1 J10.2 J11.1 J11.2 J12.1 J12.2 J13.1 J13.2 J14.1 J14.2 J15.1 J15.2 J16.1 J16.2 J17.1 J17.2 J18.1 J18.2 J19.1 J19.2 J20.1 J20.2 J21.1 J21.2 J22.1 J22.2 J23.1 J23.2 P1.3 U1.1 U2.1 U3.1 U4.1 U5.1 U6.1 U7.1 U8.1 U9.1 U10.1 U11.1 U12.1 U13.1 U14.1 U15.1 U16.1 U17.1 | length 29334.8
  Bottom Layer w20: P1.3 -39,3200 -30,3191 57.65,3191 92.65,3156 2179,3156 2180,3155 ; J1.1@214.51,3358.93 U2.1@214.51,3540 ; J1.2@222,3207 J1.2@222,3224.07 ; U1.1 242.51,927.92 466.43,704 4333,704 4670,1041 4670,3155 2180,3155 ; J23.2 781.14,838.07 J10.2 ; 800,3159 J5.2 ; J5.1@801,3336 801,3537.49 U4.1 ; J10.1@862.51,962.51 U3.1@862.51,2490.49 ; 1360,3157 J6.2 ; J6.1@1362.51,3338.49 U6.1 ; J22.2 1438.86,836.93 J11.2 ; J11.1 1442.51,974.44 U5.1 ; U17.1 1842.51,5385.06 1875,5352.57 1875,4889 1970,4794 1970,4086 2078.18,3977.82 2078.18,3664 2078.18,3459.75 J9.1 ; 1910,3156 J7.2 ; J7.1 1911.65,3359.58 1911.65,3417.65 1964,3470 1964,3537.51 U8.1 ; J21.2 2043.86,836.93 J12.2 ; J12.1@2042.51,951.49 U7.1 ; 2078.22,3656.35 2078.22,3663.97 ; J9.2 2180,3155 ; J20.2 2618.86,836.93 J17.2 ; J8.1@2547.51,3370.49 U10.1 ; 2555,3156 J8.2 ; J17.1@2621,981 2622.51,982.51 U9.1@2622.51,2495 ; 3110,3158 J4.2 ; J4.1 3110,3486.49 U12.1 ; J19.2 J16.2@3213.86,836.93 ; J16.1@3217,956 3222.51,961.51 3222.51,2549 ; J18.2 3793.86,836.93 J15.2 ; 3755,3156 J2.2 ; U14.1 3762.51,3349.49 J2.1@3776,3336 ; J15.1@3790,969 3802.51,981.51 3802.51,2599 ; J13.1 4257.37,836.93 J14.2 ; J14.1@4255,985 4255,1009 4362.51,1116.51 4362.51,2599 ; J3.1@4312,3336 4322.51,3346.51 U16.1 ; 4320,3156 J3.2
VCC: C3.P L1.2 P1.1 R75.2 U1.15 U1.16 U2.15 U2.16 U3.15 U3.16 U4.15 U4.16 U5.15 U5.16 U6.15 U6.16 U7.15 U7.16 U8.15 U8.16 U9.15 U9.16 U10.15 U10.16 U11.15 U11.16 U12.15 U12.16 U13.15 U13.16 U14.15 U14.16 U15.15 U15.16 U16.15 U16.16 U17.16 | length 31862.3
  Bottom Layer w20: P1.1@-402,3402 -446,3358 -446,2752.51 -418.92,2725.43 -171.57,2725.43 -115,2782 -115,2923 -26.35,3011.65 24.85,3011.65 106.94,2929.57 292.43,2929.57 358.18,2863.82 358.18,2581.68 390.86,2549 U1.15 ; R75.2 -260.63,3758.35 C3.P@-123.28,3621 ; U17.16 1986,5459 1919,5392 1919,4947 2079,4787 2212,4787 2303,4878 2303,5288.21 2302.2,5289.01 2302.2,5338.71 2337.35,5373.86 2387.06,5373.86 2425,5335.92 2425,4994.43 2529.43,4890 2531,4890 2663.18,4757.82 2663.18,3621.68 2695.86,3589 U10.15 ; 4503.79,2649 4503.79,2656.07
  Bottom Layer w30: P1.1@-402,3402 -122.28,3402 ; L1.2 -65,4200.59 -65,3944 -20,3899 -20,3690 -89,3621 C3.P@-123.28,3621 ; C3.P -122.28,3402 ; U2.15 U2.16 371.49,3291 ; U1.15@431.49,2544 U1.16 431.49,944.51 471,905 1051.49,905 ; U4.15 U4.16 991.49,3301.49 981,3291 ; 1051.49,2537 U3.16 1051.49,905 ; U6.15 U6.16 1551.49,3292.49 1550,3291 ; U5.15@1631.49,2539 U5.16 1631.49,905 ; U8.15 U8.16 2255.05,3435.43 2255.05,3295.46 ; U7.16 2231.49,905 ; U10.15@2732,3579 2732,3291 ; 2811.49,2537 2811.49,905 ; U12.15 3434,3506.49 3434,3302.49 ; 3411.49,2599 U11.15 U11.16 3411.49,905 ; U14.15 U14.16 3951.49,3297.49 ; 3991.49,905 3411.49,905 ; 3991.49,2649 U13.15 U13.16 3991.49,906.49 4390.56,906.49 4551.49,1067.42 U15.16 U15.15 4551.49,2649 4503.79,2649 ; U16.15 U16.16 4511.49,3337.49 4465.43,3291.43 4430.07,3291.43 4429.64,3291 3957.98,3291 3951.49,3297.49 ; -122.28,3402 -122.28,3398.28 -69,3345 -60.36,3345 -6.36,3291 371.49,3291 ; 371.49,3291 981,3291 ; 981,3291 1550,3291 ; 1051.49,905 1631.49,905 ; 1550,3291 2732,3291 ; 1631.49,905 2231.49,905 ; 2231.49,905 2811.49,905 ; 2732,3291 3945,3291 3951.49,3297.49 ; 2811.49,905 3411.49,905
VIN: C1.P P2.1 R73.1 U18.6 | length 3384.5
  Bottom Layer w30: R73.1 -534.37,3915 U18.6
  Bottom Layer w40: R73.1 -540,1505 -495,1460 -322.28,1460 C1.P -142.28,1897.72 P2.1@-60,1980
pads on no net: P2.3 U1.10 U1.11 U1.12 U1.13 U1.14 U2.10 U2.11 U2.12 U2.13 U2.14 U3.10 U3.11 U3.12 U3.13 U3.14 U4.10 U4.11 U4.12 U4.13 U4.14 U5.10 U5.11 U5.12 U5.13 U5.14 U6.10 U6.11 U6.12 U6.13 U6.14 U7.10 U7.11 U7.12 U7.13 U7.14 U8.10 U8.11 U8.12 U8.13 U8.14 U9.10 U9.11 U9.12 U9.13 U9.14 U10.10 U10.11 U10.12 U10.13 U10.14 U11.10 U11.11 U11.12 U11.13 U11.14 U12.10 U12.11 U12.12 U12.13 U12.14 U13.10 U13.11 U13.12 U13.13 U13.14 U14.10 U14.11 U14.12 U14.13 U14.14 U15.10 U15.11 U15.12 U15.13 U15.14 U16.10 U16.11 U16.12 U16.13 U16.14 U17.9 U17.10

## Polygon pours and split planes (outlines as drawn)
GND on Bottom Layer "Mechanical 13-No Net" (solid, pour order 1000): -590,5905 4724,5905 4724,591 -590,591